# Altium PCB Iter2.PcbDoc
Units mil, origin at the board's own origin, x right, y up, seen from the top; angles counter-clockwise.
Board outline 1355 x 860 mil, 2 copper layers (Top Layer, Bottom Layer); 19 components, 18 nets, 57 pads, 5 vias.
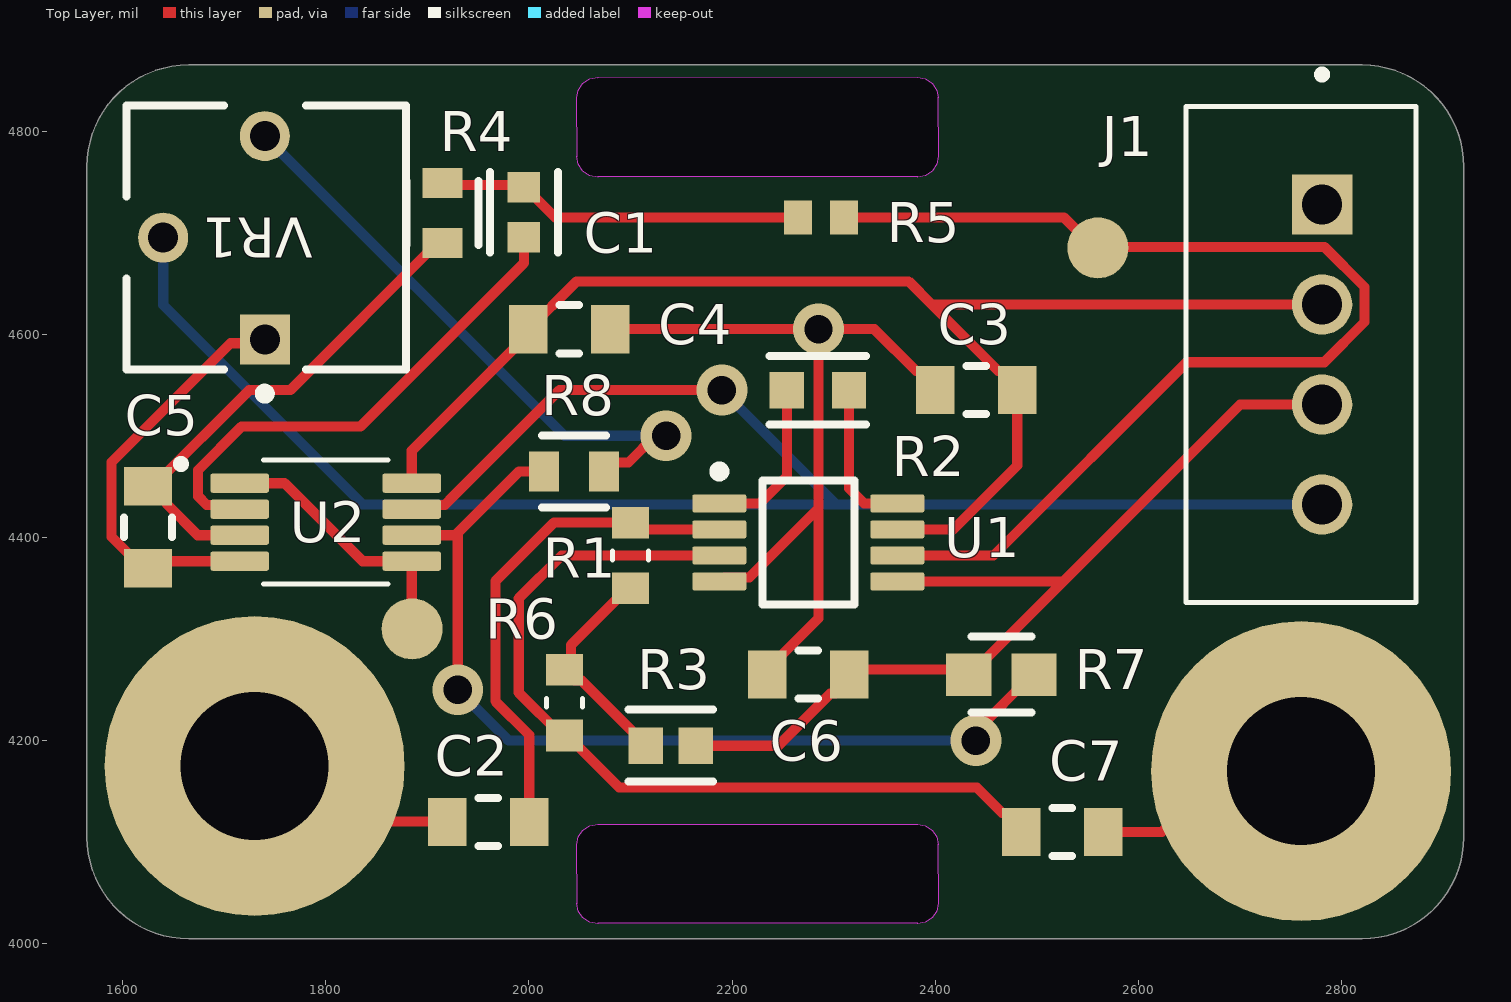
[diagram p0: Top Layer view]
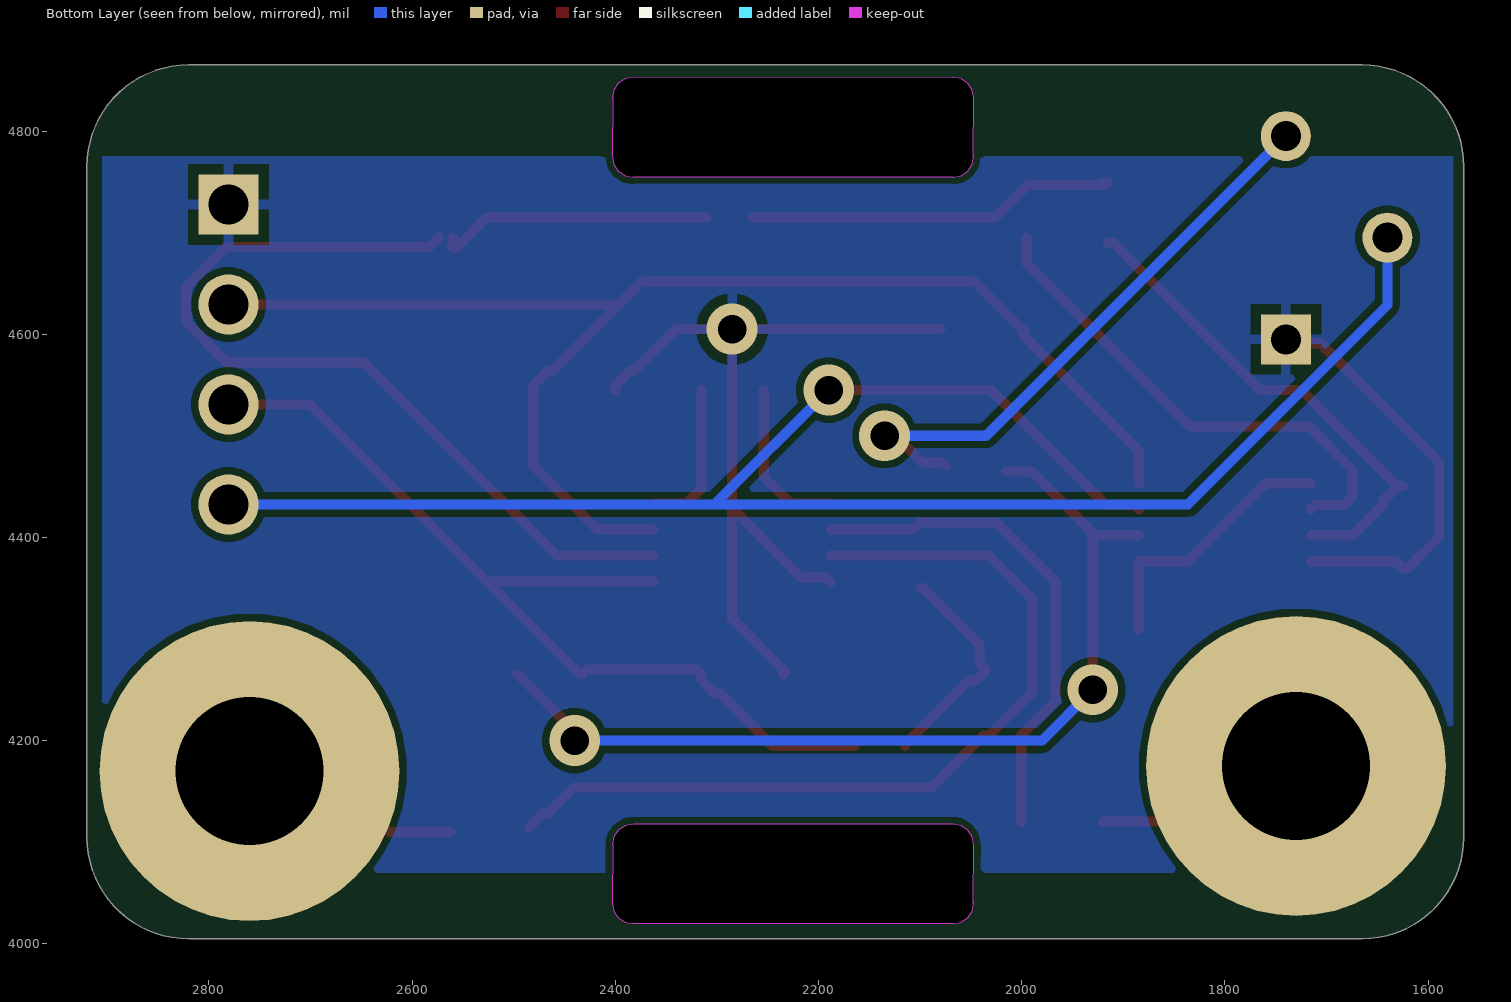
[diagram p1: Bottom Layer view, seen from below]
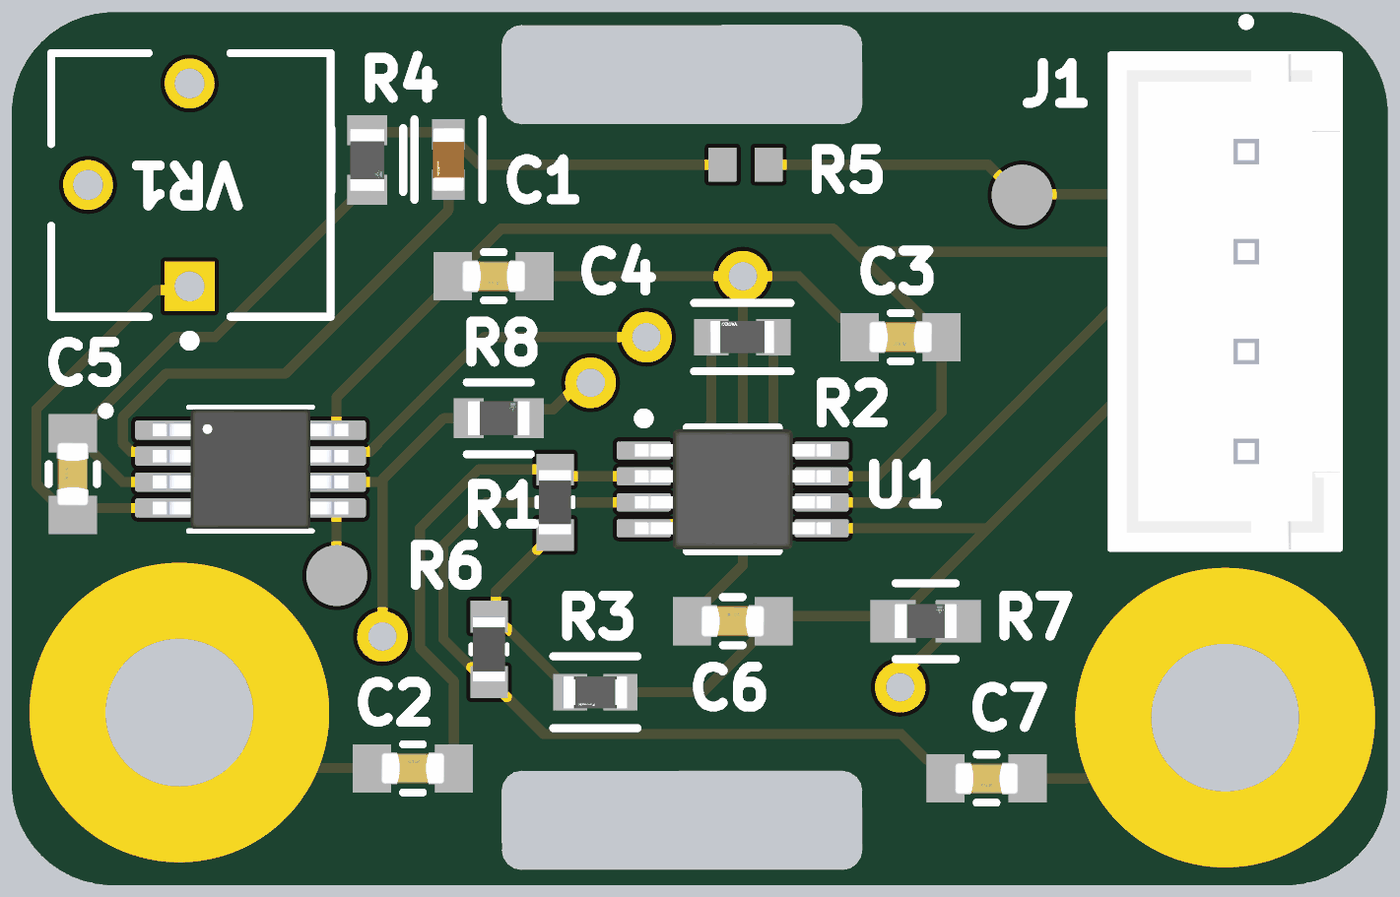
[diagram p2: 3D render of the assembled board from above, using the file's embedded part models]

## Layer stack, top to bottom
Top Solder: solder mask 0.4, Solder Resist, Dk 3.5
Top Layer: signal copper 1.4
Dielectric 1: dielectric 12.6, FR-4, Dk 4.8
Bottom Layer: signal copper 1.4
Bottom Solder: solder mask 0.4, Solder Resist, Dk 3.5

## Board outline
1565,4105 1565,4765 cw(c1665,4765) 1665,4865 2820,4865 cw(c2820,4765) 2920,4765 2920,4105 cw(c2820,4105) 2820,4005 1665,4005 cw(c1665,4105)
cut-out: 2053.08,4846.92 2059.7,4851.34 2067.5,4852.89 2067.5,4852.5 2382.5,4852.89 2390.3,4851.34 2396.92,4846.92 2401.34,4840.3 2402.89,4832.5 2402.5,4832.5 2402.89,4775 2401.34,4767.2 2396.92,4760.58 2390.3,4756.16 2382.5,4754.61 2382.5,4755 2067.5,4755 2067.5,4754.61 2059.7,4756.16 2053.08,4760.58 2048.66,4767.2 2047.11,4775 2047.5,4775 2047.11,4832.5 2048.66,4840.3
cut-out: 2053.08,4111.92 2059.7,4116.34 2067.5,4117.89 2067.5,4117.5 2382.5,4117.89 2390.3,4116.34 2396.92,4111.92 2401.34,4105.3 2402.89,4097.5 2402.5,4097.5 2402.89,4040 2401.34,4032.2 2396.92,4025.58 2390.3,4021.16 2382.5,4019.61 2382.5,4020 2067.5,4020 2067.5,4019.61 2059.7,4021.16 2053.08,4025.58 2048.66,4032.2 2047.11,4040 2047.5,4040 2047.11,4097.5 2048.66,4105.3

## Design rules (kind name [scope] priority, off if disabled: settings)
Clearance [All] p1: gap=7 ignorepadtopadclearanceinfootprint=TRUE
HoleSize [All] p1: absolutevalues=TRUE maxlimit=200 minlimit=11.81 maxpercent=80.000 minpercent=20.000
MinimumSolderMaskSliver [All] p1: minsoldermaskwidth=5
PolygonConnect [All] p1: connectstyle=Relief reliefconductorwidth=10 reliefentries=4 polygonreliefangle="90 Angle" airgapwidth=10
RoutingVias [All] p1: holewidth=28 width=50 viastyle="Through Hole" minholewidth=28 minwidth=50 maxholewidth=28 maxwidth=50
SilkToSolderMaskClearance [IsText] p1: minsilkscreentomaskgap=10 clearancetoexposedcopper=TRUE
SolderMaskExpansion [All] p1: expansion=4 istentingtop=FALSE
SupplyNets "Schematic Supply Nets_4" [InNet('in2')] p1: voltage=0.000
SupplyNets "Schematic Supply Nets_3" [InNet('in1')] p2: voltage=0.000
SupplyNets "Schematic Supply Nets_2" [InNet('VREF')] p3: voltage=0.000
SupplyNets "Schematic Supply Nets_1" [InNet('VCC')] p4: voltage=0.000
SupplyNets "Schematic Supply Nets" [InNet('GND')] p5: voltage=0.000
Width [All] p1: maxlimit=10 minlimit=10 preferedwidth=10
27 further rules are at their usual default settings.

## Classes and differential pairs
component class electrode_module3.3: C2 C4 C5 C6 C7 R1 R2 R3 R4 R5 R6 R7 R8 U1 U2

## Components (designator, comment, footprint, x,y, rotation, side; value= is the part's Value field where it differs from the comment)
C1 "GRM188R71E224KA88D" FP-GRM188-0_1-e0_2_0_5-IPC_C 1995,4720 r270 top
C2 "100n" FP-CGA3E-0_3-0_1-IPC_A 1960,4120 r0 top
C3 "CGA3E2X7R1H104K080AA" FP-CGA3E-0_3-0_1-IPC_A 2440.35,4545 r180 top
C4 "CGA3E2X7R1H104K080AA" FP-CGA3E-0_3-0_1-IPC_A 2039.64,4605 r180 top
C5 "CGA3E2X7R1H104K080AA" FP-CGA3E-0_3-0_1-IPC_A 1625,4410 r90 top
C6 "CGA3E2X7R1H104K080AA" FP-CGA3E-0_3-0_1-IPC_A 2275,4265 r0 top
C7 "100n" FP-CGA3E-0_3-0_1-IPC_A 2525,4110 r180 top
J1 "B4B-XH-A(LF)(SN)" JST_B4B-XH-A(LF)(SN) 2760,4580 r90 top
R1 "RT0603BRD071ML" RESC1608X55N 2100,4382.28 r90 top
R2 "AC0603FR-071KL" FP-AC0603-IPC_B 2284.42,4545 r180 top
R3 "ERA-3AEB103V" FP-ERA3A-IPC_C 2139.63,4195 r180 top
R4 "3k" FP-CRCW0603-e3-MFG 1915,4719.53 r270 top
R5 "1.6k" RESC1609X50X30LL10T20 2287.64,4715 r0 top
R6 "RT0603BRD071ML" RESC1608X55N 2035,4237.28 r90 top
R7 "300" FP-CRCW0603-e3-IPC_A 2465,4265 r0 top
R8 "3k" FP-CRCW0603-e3-MFG 2044.53,4464.99 r0 top
U1 "INA333AIDGKR" DGK0008A_N 2275,4395 r0 top
U2 "TLV9002IDGKR" SOP65P490X110-8N 1800,4415 r0 top
VR1 "100k" BOUR-3362P 1741.38,4695 r90 top

## Footprints (in the part's own frame and the unit in brackets; to place one, negate y for a bottom-side part, rotate by r counter-clockwise, add the part's x,y. Pads: shape width x height; smd on the part's side, far side on the other; paste and mask are expansions set on the pad)
BOUR-3362P [mm] "THD, 3-Leads, Body 6.6x6.99mm, Pitch 2.54mm"
  rect 1.25x1.25 hole 0.75: 1(-2.54,0.035)
  round 1.25 hole 0.75: 2(0,2.575) 3(2.54,0.035)
  silkscreen extent -4.02,-3.49 3.3,3.49, body extent -3.3,-3.49 3.3,3.49, height 4.95
DGK0008A_N [mm] "TSOP, 8-Leads, Body 3.1x3.1mm, Pitch 0.65mm, IPC Medium Density"
  rrect22% 1.35x0.45 smd: 1(-2.225,0.975) 2(-2.225,0.325) 3(-2.225,-0.325) 4(-2.225,-0.975) 5(2.225,-0.975) 6(2.225,-0.325) 7(2.225,0.325) 8(2.225,0.975)
  silkscreen extent -2.35,-1.55 1.15,1.9, body extent -2.45,-1.5 2.45,1.5, height 0.94
FP-AC0603-IPC_B [mil]
  rect 33.81x35.91 smd paste+0 mask+0: 1(-30.58,0) 2(30.58,0)
  silkscreen extent -47,-34 47,34, body extent -57,-28 57,28, height 10
FP-CGA3E-0_3-0_1-IPC_A [mm]
  rect 0.956x1.206 smd paste+0 mask+0: 1(-1.025,0) 2(1.025,0)
  silkscreen extent -0.25,-0.6 0.25,0.6, body extent -2,-1.1 2,1.1, height 0.25
FP-CRCW0603-e3-IPC_A [mil]
  rect 44.69x41.82 smd paste+0 mask+0: 1(-32.1,0) 2(32.1,0)
  silkscreen extent -30,-37 30,37, body extent -74,-41 74,41, height 10
FP-CRCW0603-e3-MFG [mm]
  rect 0.75x1 smd paste+0 mask+0: 1(-0.75,0) 2(0.75,0)
  silkscreen extent -0.8,-0.9 0.8,0.9, body extent -1.22,-0.6 1.22,0.6, height 0.25
FP-ERA3A-IPC_C [mil]
  rect 33.66x35.68 smd paste+0 mask+0: 1(-24.63,0) 2(24.63,0)
  silkscreen extent -41,-35 41,35, body extent -45,-24 45,24, height 10
FP-GRM188-0_1-e0_2_0_5-IPC_C [mil]
  rect 29.87x31.97 smd paste+0 mask+0: 1(-24.67,0) 2(24.67,0)
  silkscreen extent -40,-33 40,33, body extent -44,-22 44,22, height 10
JST_B4B-XH-A(LF)(SN) [mm]
  rect 1.508x1.508 / inner round 1.508 / far side rect 1.508x1.508 hole 1: 1(3.75,-0.525)
  round 1.508 hole 1: 2(1.25,-0.525) 3(-1.25,-0.525) 4(-3.75,-0.525)
  silkscreen extent -6.2,-2.88 7.1,2.88, body extent -6.2,-2.88 6.2,2.88, height 7
RESC1608X55N [mm]
  rect 0.79x0.93 smd: 1(-0.82,0) 2(0.82,0)
  silkscreen extent -0.11,-0.45 0.11,0.45, body extent -0.8,-0.4 0.8,0.4, height 0.55
RESC1609X50X30LL10T20 [mm] "Chip Resistor, 2-Leads, Body 1.55x0.85mm, IPC High Density"
  rect 0.7x0.85 smd: 1(-0.575,0) 2(0.575,0)
  body extent -0.82,-0.48 0.82,0.48, height 0.5
SOP65P490X110-8N [mm]
  rrect25% 1.47x0.48 smd: 1(-2.15,0.975) 2(-2.15,0.325) 3(-2.15,-0.325) 4(-2.15,-0.975) 5(2.15,-0.975) 6(2.15,-0.325) 7(2.15,0.325) 8(2.15,0.975)
  silkscreen extent -3.72,-1.55 1.55,1.55, body extent -2.45,-1.5 2.45,1.5, height 1.1

## Part data
C1: library part CMP-1035-02648-3, "Chip Multilayer Ceramic Capacitors for General Purpose, 0603, 0.22uF, X7R, 15%, 10%, 25V", Capacitance=220nF, Case Code (Imperial)=0603, Case Code (Metric)=1608, Dielectric=X7R, Max Operating Temperature=125°C, Min Operating Temperature=-55°C, Package Quantity=1, Tolerance=10%, Voltage=50V, Voltage Rating=25V, Case/Package=0603, Depth=0.8mm, Height=0.8mm, Lead Free="Lead Free", Length=1.6mm, Material=Ceramic, Mount="Surface Mount", Number of Pins=2, Packaging="Tape and Reel", Radiation Hardening=No, REACH SVHC="No SVHC", Termination=SMD/SMT, Thickness=0.035inch, Voltage Rating (DC)=25V, Width=0.8mm
C2 C3 C4 C5 C6 C7: library part CMP-2000-07546-2, "Cap Ceramic 100nF 50V X7R 10% Pad SMD 0603 +125°C Automotive T/R", Capacitance=100nF, Case Code (Imperial)=0603, Case Code (Metric)=1608, Dielectric=X7R, Max Operating Temperature=125°C, Min Operating Temperature=-55°C, Package Quantity=1, Ratings=AEC-Q200, Tolerance=10%, Voltage=50V, Case/Package=0603, Composition=Ceramic, Depth=0.8mm, Height=0.8mm, Lead Free="Lead Free", Length=1.6mm, Mount="Surface Mount", Packaging="Tape and Reel", Radiation Hardening=No, REACH SVHC="No SVHC", Termination=SMD/SMT, Thickness=0.035inch, Voltage Rating=50V, Voltage Rating (DC)=50V, Weight=7.1E-05oz, Width=0.8mm
J1: "Connector Header Through Hole 4 position 0.098 (2.50mm)", Package=None, Check_prices=https://www.snapeda.com/parts/B4B-XH-A(LF)(SN)/JST+Sales+America+Inc./view-part/?ref=eda, MF="JST Sales", MP=B4B-XH-A(LF)(SN), SnapEDA_Link=https://www.snapeda.com/parts/B4B-XH-A(LF)(SN)/JST+Sales+America+Inc./view-part/?ref=snap
R1 R6: "1 MOhms Â±0.1% 0.1W, 1/10W Chip Resistor 0603 (1608 Metric) Thin Film", Package="1608 Yageo", Supplier Part Number 1=1102081, Check_prices=https://www.snapeda.com/parts/RT0603BRD071ML/Yageo/view-part/988154/?ref=eda, Digi-Key_Part_Number=YAG4498CT-ND, MF=Yageo, MP=RT0603BRD071ML, Purchase-URL=https://pricing.snapeda.com/search/part/RT0603BRD071ML/?ref=eda, SnapEDA_Link=https://www.snapeda.com/parts/RT0603BRD071ML/Yageo/view-part/988154/?ref=snap, Supplier 1="Future Electronics"
R2: library part CMP-2000-04828-3, "RES 1kΩ 1.00% 0.1W 0603", Case Code (Imperial)=0603, Case Code (Metric)=1608, Max Operating Temperature=155°C, Max Power Dissipation=100mW, Min Operating Temperature=-55°C, Package Quantity=1, Ratings=AEC-Q200, Resistance=1kR, Resistor Type="Thick Film", Temperature Coefficient=100ppm/°C, Tolerance=1%, Voltage Rating=50V, Case/Package=0603, Construction=Rectangular, Depth=0.8mm, Features="Moisture Resistant", Height=0.022inch, Lead Free="Lead Free", Length=0.063inch, Military Standard=Not, Number of Terminations=2, Packaging="Tape and Reel", Power Rating=100mW, RoHS Compliant=Yes, Series=AC, Size Code=0603, Termination=SMD/SMT, Width=0.031inch
R3: library part CMP-2000-00874-2, "RES SMD 10K OHM 0.1% 1/10W 0603", Case Code (Imperial)=0603, Case Code (Metric)=1608, Max Operating Temperature=155°C, Max Power Dissipation=100mW, Min Operating Temperature=-55°C, Package Quantity=5000, Resistance=10kR, Resistance Tolerance=0.1%, Resistor Type="Thin Film", Temperature Coefficient=25ppm/°C, Voltage Rating=75V, Case/Package=0603, Construction=Rectangular, Contact Plating=Tin, Depth=0.8mm, Height=0.45mm, Lead Free="Lead Free", Length=1.6mm, Military Standard=Not, Mount="Surface Mount", Number of Pins=2, Number of Terminations=2, Packaging="Tape and Reel", Power Rating=100mW, Radiation Hardening=No, REACH SVHC="No SVHC", RoHS Compliant=Yes, Series=ERA-3A, Size Code=0603, Technology="METAL FILM", Termination=SMD/SMT, Tolerance=0.1%, Voltage Rating (DC)=75V, Width=0.8mm
R4 R8: library part CMP-2000-03293-2, "RES Thick Film, 3kΩ, 1%, 0.1W, 100ppm/°C, 0603", Case Code (Imperial)=0603, Case Code (Metric)=1608, Max Operating Temperature=155°C, Max Power Dissipation=100mW, Min Operating Temperature=-55°C, Package Quantity=10, Resistance=3kR, Temperature Coefficient=100ppm/°C, Tolerance=1%, Voltage Rating=75V, Case/Package=0603, Composition="Thick Film", Contact Plating=Tin, Depth=0.85mm, Features="Automotive AEC-Q200", Height=0.45mm, Lead Free="Lead Free", Length=1.55mm, Military Standard=Not, Mount="Surface Mount", Number of Terminations=2, Packaging="Tape and Reel", Power Rating=100mW, Radiation Hardening=No, Termination=SMD/SMT, Voltage Rating (DC)=75V, Weight=7.1E-05oz, Width=0.85mm
R5: library part CMP-2000-03000-1, Manufacturer="Vishay Dale", Part Number=CRCW06031K60FKEA
R7: library part CMP-2000-03216-2, "RES Thick Film, 300Ω, 1%, 0.1W, 100ppm/°C, 0603", Case Code (Imperial)=0603, Case Code (Metric)=1608, Max Operating Temperature=155°C, Max Power Dissipation=100mW, Min Operating Temperature=-55°C, Package Quantity=10, Resistance=300R, Temperature Coefficient=100ppm/°C, Tolerance=1%, Voltage Rating=75V, Case/Package=0603, Composition="Thick Film", Contact Plating=Tin, Depth=0.85mm, Features="Automotive AEC-Q200", Height=0.45mm, Lead Free="Lead Free", Length=1.55mm, Military Standard=Not, Mount="Surface Mount", Number of Terminations=2, Packaging="Tape and Reel", Power Rating=100mW, Radiation Hardening=No, Termination=SMD/SMT, Voltage Rating (DC)=75V, Weight=7.1E-05oz, Width=0.033inch
U1: library part CMP-0944-00088-2, "Low Power, Precision Instrumentation Amplifier, -40 to 125 degC, 8-pin SOP (DGK8), Green (RoHS & no Sb/Br)", Input Bias Current (+/-)(Max)(nA)=0.2, Manufacturer="Texas Instruments", Quiescent Current (+/-)(Typ)(mA)=0.05, CMRR(Min)(dB)=100, Code_JEDEC=MO-187, ComponentLink1Description="Manufacturer URL", ComponentLink1URL=http://www.ti.com/, ComponentLink2Description=Datasheet, ComponentLink2URL=http://www.ti.com/general/docs/lit/getliterature.tsp?genericPartNumber=INA333&fileType=pdf, ComponentLink3Description="Package Specification", ComponentLink3URL=http://www.ti.com/litv/pdf/mpds028d, DatasheetVersion=SBOS445B, Eco-Plan="Green (RoHS & no Sb/Br)", Gain(V/V)="1 to 1000", Input Offset (+/-)(Max)(uV)=25, Input Offset Drift (+/-)(Max)(uV/Degrees Celsius)=0.1, Mounting Technology="Surface Mount", Noise at 1kHz(Typ)(nV/rt(Hz))=50, Number of Channels=1, Output Offset (+/-)(Max)(uV)=75/G, Output Offset Drift (+/-)(Max)(uV/Degrees Celsius)=0.5/G, PackageDescription="8-Pin Thin Small Outline, Body 3 x 3 mm, Pitch 0.65 mm", PackageReference=DGK0008A, PackageVersion="4073329/E, 05/2006", PartNumber=INA333AIDGKR, SubFamily="Single Supply", Vs(Max)(V)=5.5, Vs(Min)(V)=1.8
U2: "Dual, 5.5-V, 1-MHz, RRIO operational amplifier for cost-optimized applications", Package="VSSOP-8 Texas Instruments", Check_prices=https://www.snapeda.com/parts/TLV9002IDGKR/Texas+Instruments/view-part/?ref=eda, MF="Texas Instruments", MP=TLV9002IDGKR, SnapEDA_Link=https://www.snapeda.com/parts/TLV9002IDGKR/Texas+Instruments/view-part/?ref=snap
VR1: library part CMP-1747-00003-1, "Square Trimpot(R) Trimming Potentiometer, 100 KOhm, 300 V, -55 to 125 degC, 3-Pin THD, RoHS, Tube", Case\Package=Axial, Max Operating Temperature="155 degC", Min Operating Temperature="-55 degC", Package Quantity=200, Power Rating="250 mW", Resistance="1 mohm", Tolerance=1%, Voltage Rating="250 V", ComponentLink1Description="Manufacturer URL", ComponentLink1URL=http://www.bourns.com/, ComponentLink2Description=Datasheet, ComponentLink2URL=http://www.bourns.com/docs/Product-Datasheets/3362.pdf, DatasheetVersion=May-16, Length="0.248 inch", Mount="Through Hole", PackageDescription="3-Pin Through Hole Device, Body 6.6 x 6.99 mm, Pitch 2.54 mm", PackageReference=3326P, Packaging=Bulk, RoHSCompliant=true

## Free pads (board coordinates)
  round 295.28 hole 145.67 paste-99999 mask+0: 6(2760,4170) 7(1730,4175)
  round 60 smd: 9(1885,4310) 10(2560,4685)

## Via types
v1: diameter 50, hole 28, Top Layer to Bottom Layer, 5 vias

## Nets (pads, with @x,y where several pads share a name; then routed paths per layer and width w, separated by ;. In a path a pad name is that pad's centre, name@x,y a point inside that pad or via, vN(x,y) a via of type N, cw(c..) or ccw(c..) an arc to the next point about the centre after c; other vN are vias at no path point)
GND: C3.2 C4.1 C5.1 C6.1 J1.1 U1.4 U2.4 VR1.1 | length 1255.3
  Top Layer w10: U2.4 1631.97,4376.61 C5.1 1620.08,4369.65 1589.25,4400.47 1589.25,4474.15 1706.25,4591.15 1736.15,4591.15 VR1.1 ; C4.1 v1(2285,4605) ; U1.4@2188.21,4355.81 2192.88,4360.48 2216.93,4360.48 2285,4428.54 ; C6.1@2232.11,4267.53 C6.1 2234.64,4269.92 2285,4320.28 2285,4428.54 ; C3.2 2400,4549.92 2386.18,4563.74 2381.26,4563.74 2340,4605 v1(2285,4605) ; 2285,4428.54 v1(2285,4605)
in1: C2.1 pad.7 | length 325.6
  Top Layer w10: pad.7@1810,4255 pad.7 1760,4175 1814.59,4120.41 1919.23,4120.41 C2.1
in2: C7.1 pad.6 | length 265.3
  Top Layer w10: C7.1@2561.94,4110 2622.8,4110 2682.8,4170 pad.6 pad.6@2730,4140
NetC1_1: C1.1 R4.1 R5.1 | length 369
  Top Layer w10: R4.1@1919.92,4749.05 R4.1 1917.19,4746.86 1993.86,4746.86 2025.73,4715 R5.1
NetC1_2: C1.2 U2.2 | length 502.4
  Top Layer w10: U2.2 1711.21,4431.94 1682.83,4431.94 1674.42,4440.35 1674.42,4466.42 1717,4509 1834,4509 1995,4670 C1.2
NetC2_2: C2.2 R1.2 U1.2 | length 497.9
  Top Layer w10: C2.2 2000.36,4205.52 1967,4238.88 1967,4357 2024.57,4414.57 R1.2 2106.77,4407.8 U1.2
NetC5_2: C5.2 R4.2 U2.3 | length 497
  Top Layer w10: C5.2 C5.2@1629.92,4450.36 ; U2.3 1674.09,4402.2 1643.74,4432.56 1643.74,4436.53 C5.2@1629.92,4450.36 ; R4.2 1910.08,4690 1765.08,4545 1724.56,4545 C5.2@1629.92,4450.36
NetC7_2: C7.2 R6.1 U1.3 | length 857.1
  Top Layer w10: U1.3 2032.21,4382.21 1990,4340 1990,4247.24 2032.24,4205 R6.1 2037.76,4205 2088.83,4153.92 2440.72,4153.92 2465.9,4128.74 2470.82,4128.74 C7.2@2484.64,4114.92
NetR1_1: R1.1 R3.2 R6.2 | length 220.5
  Top Layer w10: R1.1 2097.24,4350 2041.5,4294.26 2041.5,4276.07 R6.2 2045.55,4259.01 2051.99,4259.01 2115,4196.01 R3.2
NetR2_1: R2.1 U1.8 | length 150.4
  Top Layer w10: R2.1 2315,4448.39 2330,4433.39 U1.8
NetR2_2: R2.2 U1.1 | length 162.5
  Top Layer w10: U1.1 2227.23,4433.39 2253.84,4460 R2.2
NetR7_2: R7.2 R8.1 U2.6 | length 930.2
  Top Layer w10: U2.6 1930,4402.2 ; v1(1930,4250) 1930,4402.2 ; R8.1 1990.39,4464.99 1930,4404.6 1930,4402.2 ; v1(2440,4200) 2440,4209.34 2495.66,4265 R7.2
  Bottom Layer w10: v1(1930,4250) 1980,4200 v1(2440,4200)
NetR8_2: R8.2 VR1.3 | length 589.3
  Top Layer w10: R8.2@2075,4470.85 2077.94,4473.79 2097.97,4473.79 2124.18,4500 v1(2135,4500)
  Bottom Layer w10: VR1.3 2035,4500 v1(2135,4500)
out1: J1.4 U2.7 VR1.2 | length 1801.6
  Top Layer w10: U2.7 1888.79,4431.94 1917.17,4431.94 1925.58,4440.35 1925.58,4440.58 2030,4545 v1(2190,4545)
  Bottom Layer w10: VR1.2 1640,4628.82 1836.45,4432.36 2302.64,4432.36 ; v1(2190,4545) 2302.64,4432.36 ; J1.4 2302.64,4432.36
stage1: pad.10 R5.2 U1.6 | length 1130.3
  Top Layer w10: R5.2 2526.36,4715 2556.36,4685 pad.10 pad.10@2560,4695 ; U1.6 2457.21,4382.21 2647.47,4572.47 2782.88,4572.47 2822.35,4611.95 2822.35,4646.48 2782.88,4685.95 2583.1,4685.95 pad.10@2573.82,4695.23
stage2: pad.9 U2.1 U2.5 | length 267.9
  Top Layer w10: U2.1 1759.54,4453.39 1836.31,4376.61 U2.5 1884.65,4310.35 pad.9
VCC: C3.1 C4.2 J1.2 U1.7 U2.8 | length 1366.1
  Top Layer w10: U2.8 1884.65,4485.43 1999.29,4600.08 C4.2 ; C4.2@1997.19,4602.19 2047,4652 2373.71,4652 2396.5,4629.21 ; U1.7 2417.8,4407.8 2480.71,4470.71 C3.1 2480.71,4549.92 2466.89,4563.74 2461.96,4563.74 2396.5,4629.21 ; J1.2@2771.46,4620 J1.2 2396.5,4629.21
VREF: C6.2 J1.3 R3.1 R7.1 U1.5 | length 918.8
  Top Layer w10: R3.1 2245.35,4195 2296.61,4246.26 2301.53,4246.26 2315.35,4260.08 C6.2 2320.28,4269.92 R7.1@2427.97,4269.92 ; U1.5 2525.95,4356.62 ; R7.1 2434.33,4265 2525.95,4356.62 ; J1.3 2700.12,4530.79 2525.95,4356.62

## Polygon pours and split planes (outlines as drawn)
GND on Bottom Layer "GND_L02_P001" (solid, pour order 1): 1575,4775 2905,4775 2905,4070 1575,4070